# Altium PCB ifog-pcb-analogModule.PcbDoc
Units mm, origin at the board's own origin, x right, y up, seen from the top; angles counter-clockwise.
Board outline 34.3 x 47.3 mm, 4 copper layers (Top Layer, VCC, GND, Bottom Layer), stack 0.603 mm thick; 81 components, 42 nets, 256 pads, 9 vias.
Unrouted connection lines stored in the file: 10.
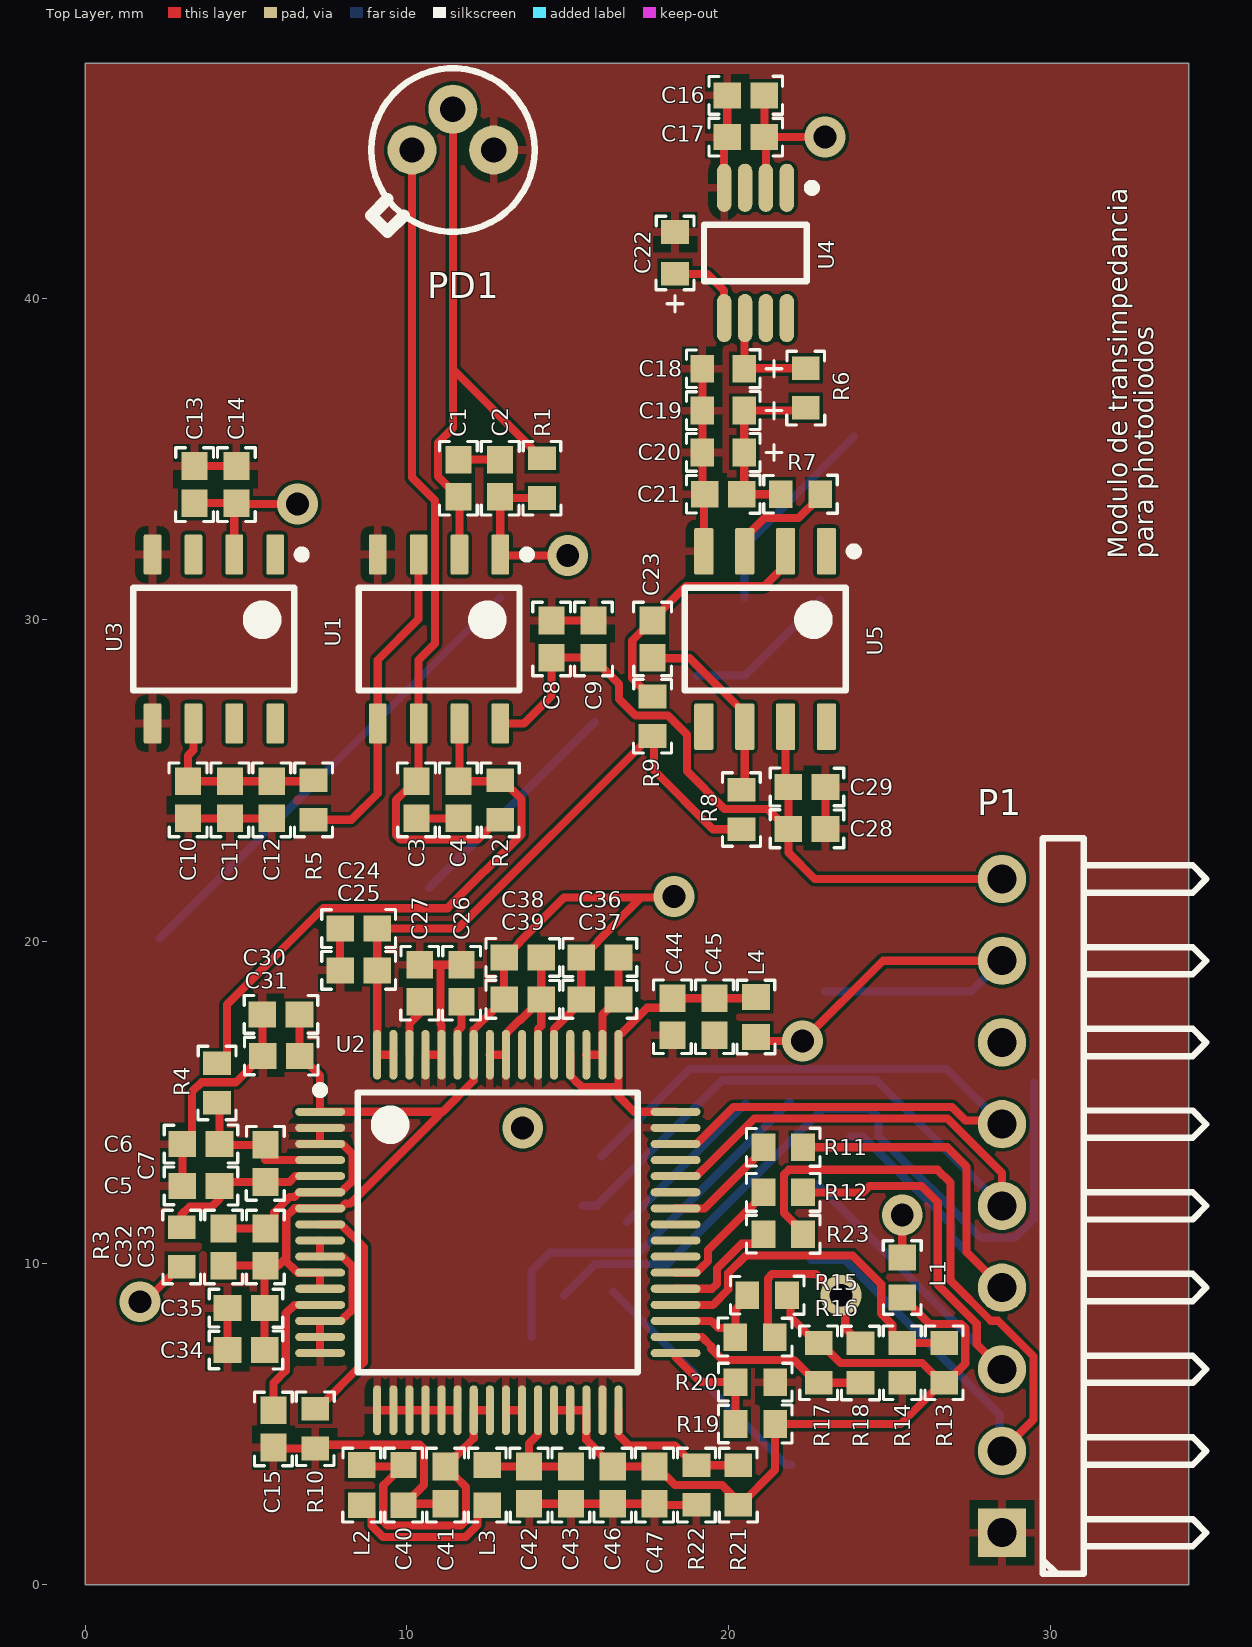
[diagram p0: Top Layer view]
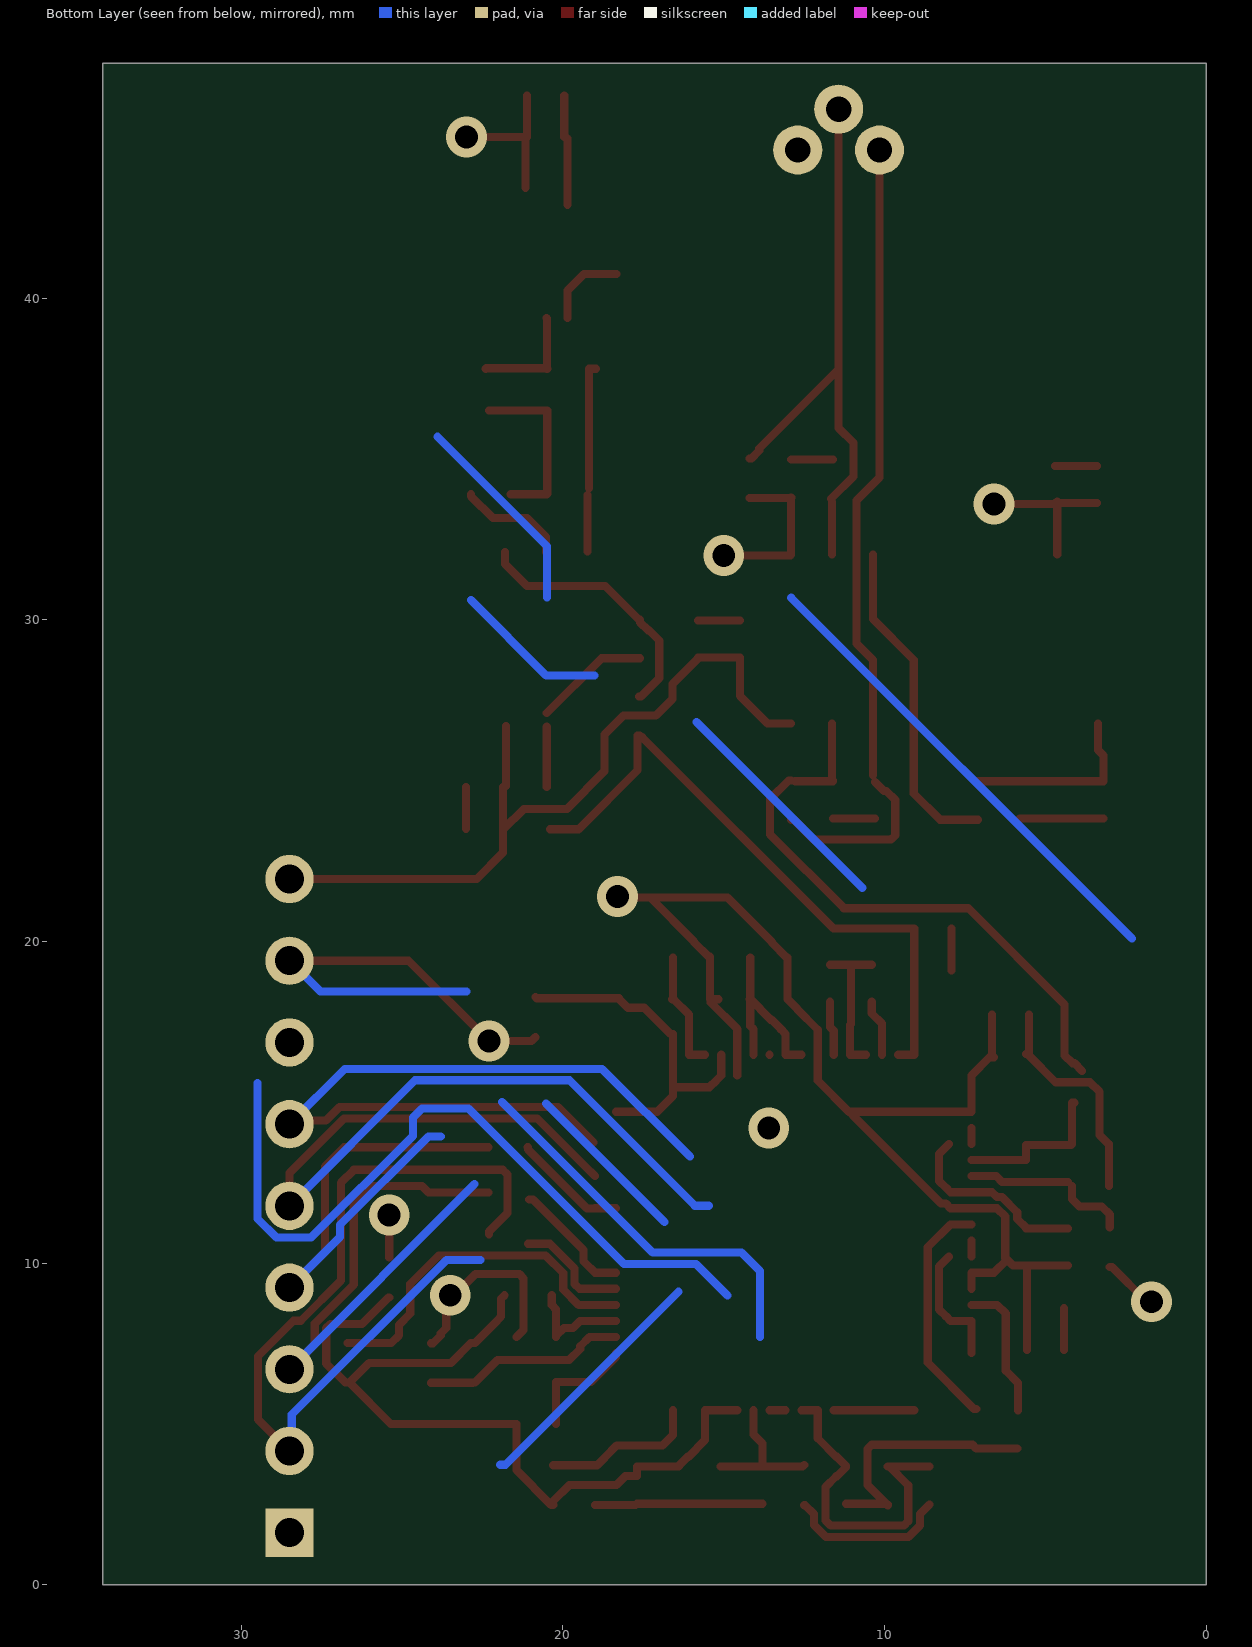
[diagram p1: Bottom Layer view, seen from below]
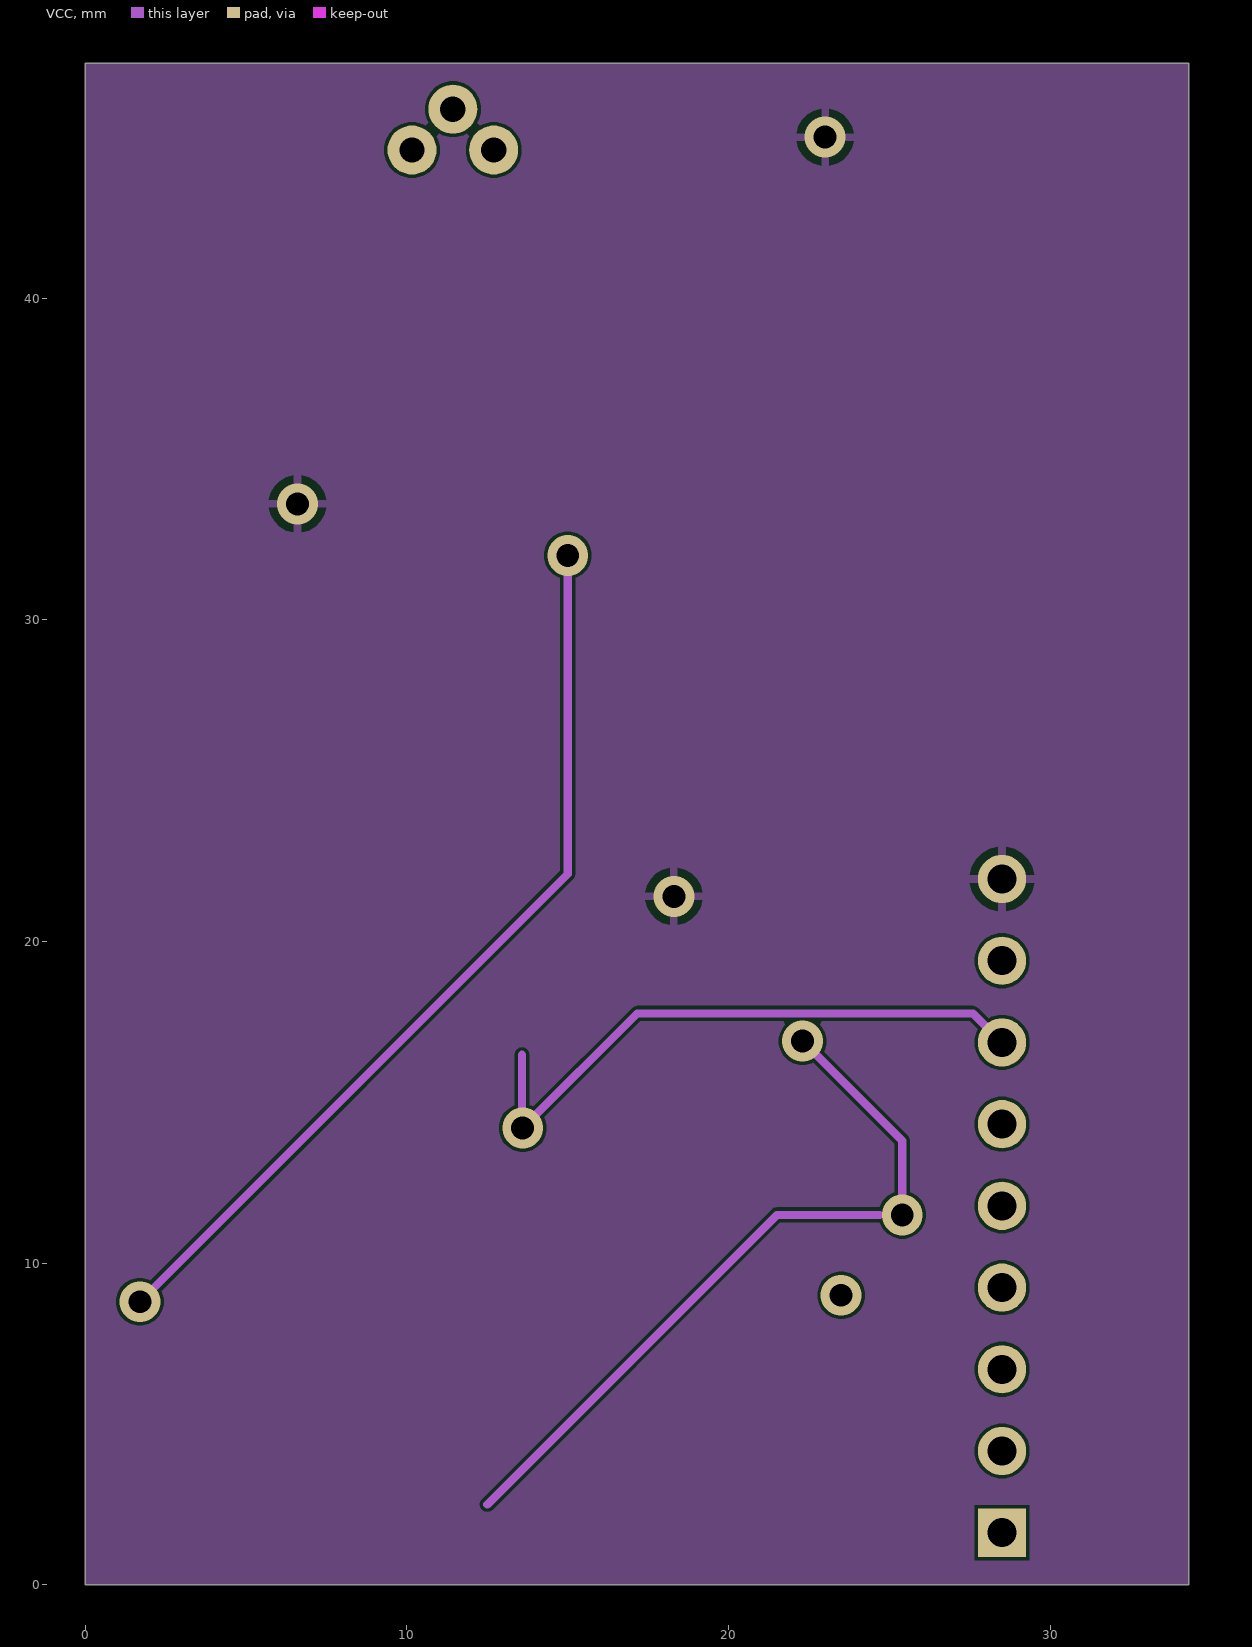
[diagram p2: VCC]
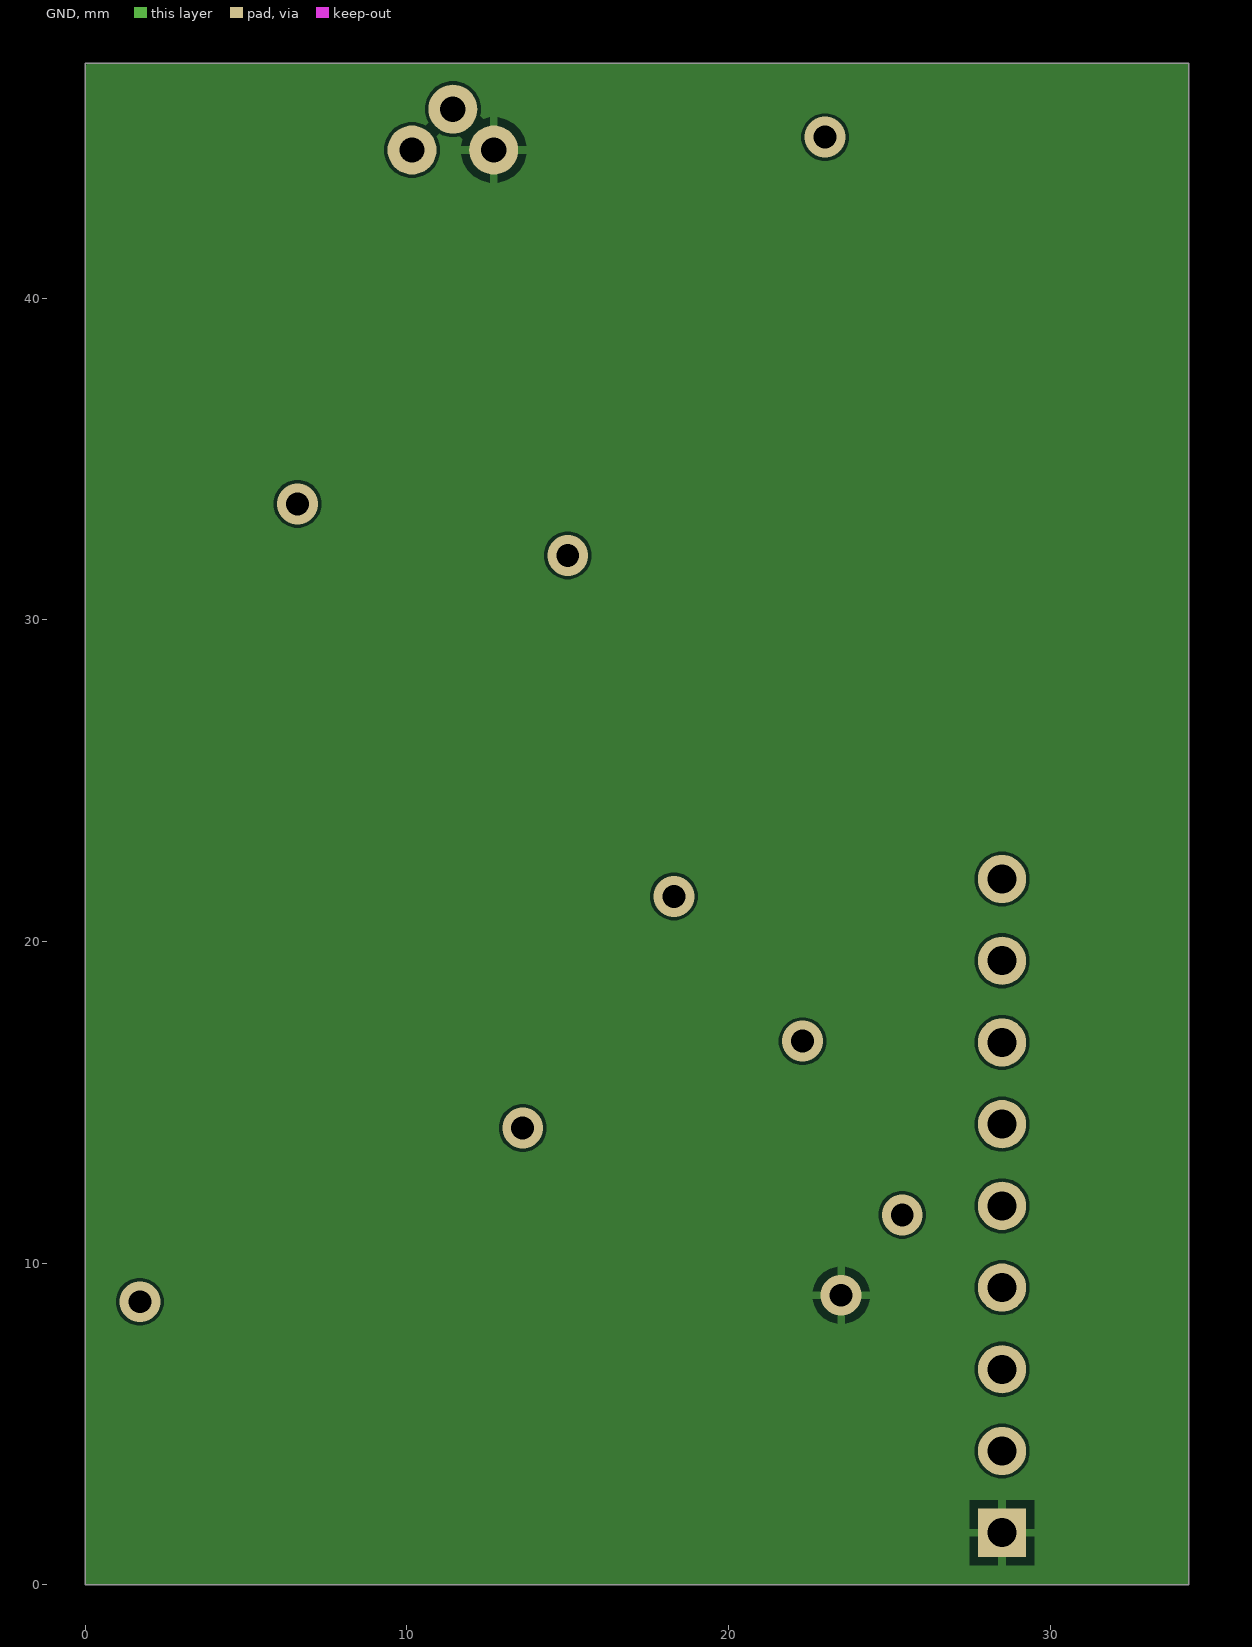
[diagram p3: GND]
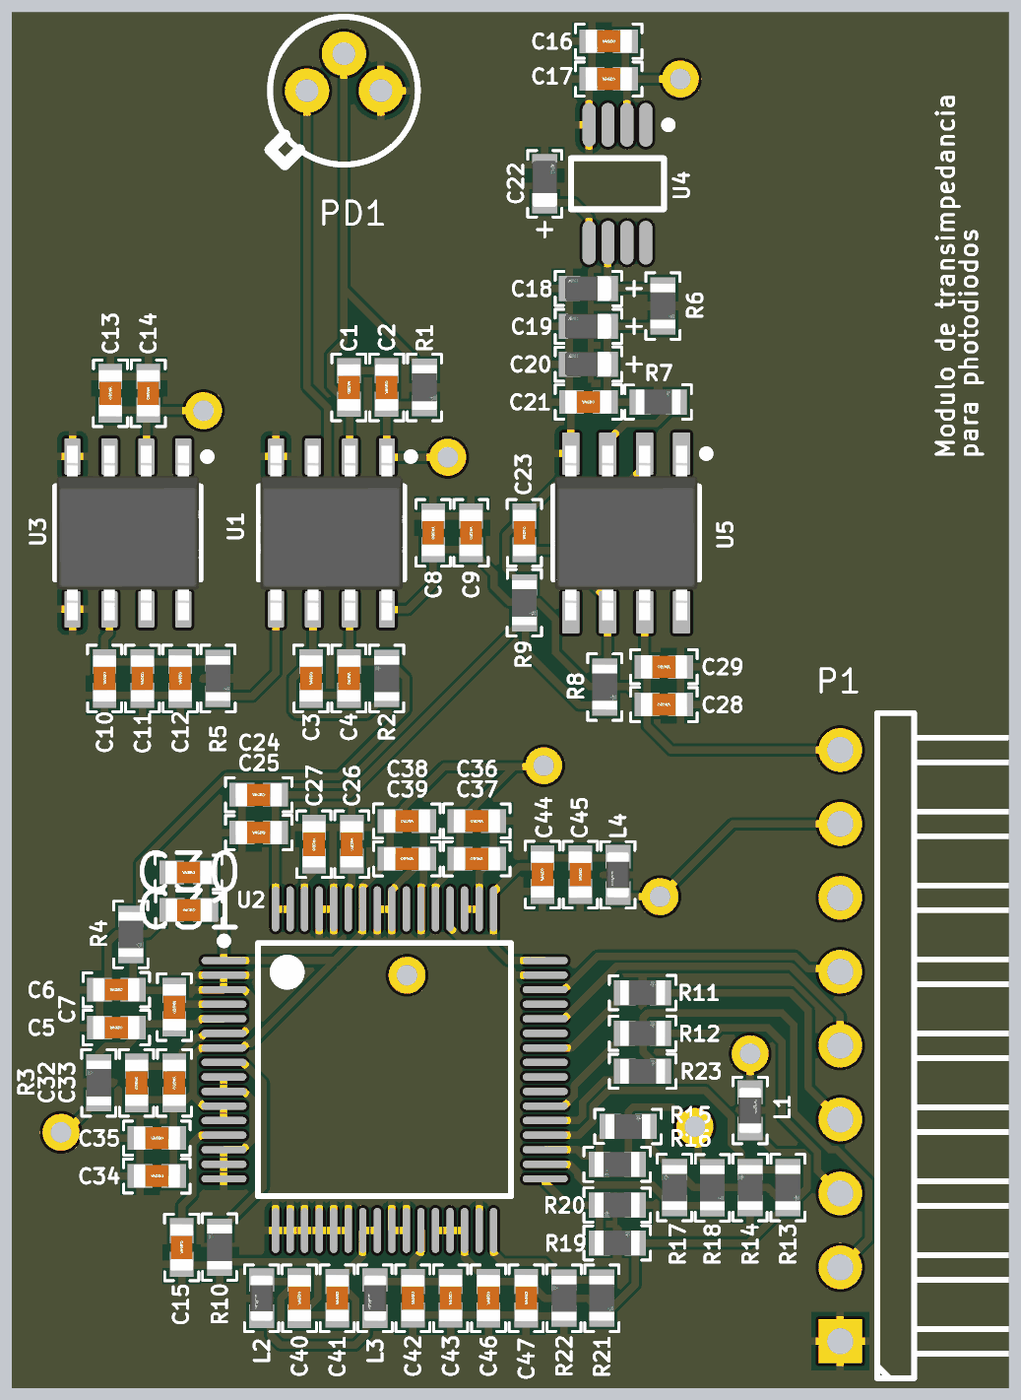
[diagram p4: 3D render of the assembled board from above, using the file's embedded part models]

## Layer stack, top to bottom
Top Solder: solder mask 0.0102, Solder Resist, Dk 3.5
Top Layer: signal copper 0.0356
Dielectric 2: prepreg 0.0711, PP-006, Dk 4.1
VCC: signal copper 0.035
Dielectric 1: core 0.32, FR-4, Dk 4.8
GND: signal copper 0.035
Dielectric 3: prepreg 0.0711, PP-006, Dk 4.1
Bottom Layer: signal copper 0.0356
Bottom Solder: solder mask 0.0102, Solder Resist, Dk 3.5

## Board outline
0,0 34.3,0 34.3,47.3 0,47.3

## Design rules (kind name [scope] priority, off if disabled: settings)
Clearance [All] p1: gap=0.1 ignorepadtopadclearanceinfootprint=TRUE except(0: Arc-Hole Track-Hole SMDPad-Hole THPad-Hole Via-Hole Fill-Hole Poly-Hole Region-Hole Text-Hole)
PolygonConnect [All] p1: connectstyle=Relief reliefconductorwidth=0.254 reliefentries=4 polygonreliefangle="90 Angle" airgapwidth=0.254
RoomDefinition ifog-pcb-analogModule [InComponentClass('ifog-pcb-analogModule')] p1: confinementstyle=ConfineIn formatcopy=TRUE lockcomponents=FALSE outline 0,0 35.7,0 35.7,65 0,65
RoutingVias [All] p1: holewidth=0.711 width=1.27 viastyle="Through Hole" minholewidth=0.711 minwidth=1.27 maxholewidth=0.711 maxwidth=1.27
SolderMaskExpansion [All] p1: expansion=0.102 istentingtop=FALSE
Width [All] p1: maxlimit=0.254 minlimit=0.254 preferedwidth=0.254
30 further rules are at their usual default settings.

## Classes and differential pairs
component class ifog-pcb-analogModule: C1 C2 C3 C4 C5 C6 C7 C8 C9 C10 C11 C12 C13 C14 C15 C16 C17 C18 C19 C20 C21 C22 C23 C24 C25 C26 C27 C28 C29 C30 C31 C32 C33 C34 C35 C36 C37 C38 C39 C40 C41 C42 C43 C44 C45 C46 C47 L1 L2 L3 L4 P1 PD1 R1 R2 R3 R4 R5 R6 R7 R8 R9 R10 R11 R12 R13 R14 R19 R20 R21 R22 R23 U1 U4 U5

## Components (designator, comment, footprint, x,y, rotation, side; value= is the part's Value field where it differs from the comment)
C1 "0.5p" CAPACITOR_0603#1 11.6,34.4 r270 top
C2 "0.5p" CAPACITOR_0603#1 12.9,34.4 r90 top
C3 "0.5p" CAPACITOR_0603#1 10.3,24.4 r90 top
C4 "0.5p" CAPACITOR_0603#1 11.6,24.4 r270 top
C5 "100p" CAPACITOR_0603#1 3.6,12.4 r0 top
C6 "100p" CAPACITOR_0603#1 3.6,13.7 r0 top
C7 "750p" CAPACITOR_0603#1 5.6,13.1 r270 top
C8 "10u" CAPACITOR_0603#1 14.5,29.4 r270 top
C9 "100n" CAPACITOR_0603#1 15.8,29.4 r270 top
C10 "10u" CAPACITOR_0603#1 3.2,24.4 r90 top
C11 "10u" CAPACITOR_0603#1 4.5,24.4 r90 top
C12 "100n" CAPACITOR_0603#1 5.8,24.4 r90 top
C13 "10u" CAPACITOR_0603#1 3.4,34.2 r270 top
C14 "100n" CAPACITOR_0603#1 4.7,34.2 r270 top
C15 "1u" CAPACITOR_0603#1 5.85,4.844 r90 top
C16 "10u" CAPACITOR_0603#1 20.537,46.3 r0 top
C17 "100n" CAPACITOR_0603#1 20.537,45 r0 top
C18 "22u" CAPACITOR_TANT_0603 19.837,37.8 r0 top value=22uF
C19 "47u" CAPACITOR_TANT_0603 19.837,36.5 r0 top value=22uF
C20 "47u" CAPACITOR_TANT_0603 19.837,35.2 r0 top value=22uF
C21 "100n" CAPACITOR_0603#1 19.837,33.9 r0 top
C22 "22u" CAPACITOR_TANT_0603 18.337,41.4 r270 top value=22uF
C23 "10n" CAPACITOR_0603#1 17.637,29.4 r90 top
C24 "100n" CAPACITOR_0603#1 8.5,20.4 r0 top
C25 "10u" CAPACITOR_0603#1 8.5,19.1 r0 top
C26 "1u" CAPACITOR_0603#1 11.7,18.7 r270 top
C27 "1u" CAPACITOR_0603#1 10.4,18.7 r270 top
C28 "10u" CAPACITOR_0603#1 22.437,23.5 r180 top
C29 "100n" CAPACITOR_0603#1 22.437,24.8 r180 top
C30 "10u" CAPACITOR_0603#1 6.086,17.732 r0 top
C31 "100n" CAPACITOR_0603#1 6.098,16.438 r0 top
C32 "10u" CAPACITOR_0603#1 4.3,10.5 r270 top
C33 "100n" CAPACITOR_0603#1 5.6,10.5 r270 top
C34 "10u" CAPACITOR_0603#1 5,7.3 r0 top
C35 "100n" CAPACITOR_0603#1 5,8.6 r0 top
C36 "10u" CAPACITOR_0603#1 16,19.5 r180 top
C37 "100n" CAPACITOR_0603#1 16,18.2 r180 top
C38 "10u" CAPACITOR_0603#1 13.6,19.5 r180 top
C39 "100n" CAPACITOR_0603#1 13.6,18.2 r180 top
C40 "10u" CAPACITOR_0603#2 9.9,3.1 r90 top
C41 "100n" CAPACITOR_0603#1 11.2,3.1 r90 top
C42 "10u" CAPACITOR_0603#1 13.8,3.1 r90 top
C43 "100n" CAPACITOR_0603#1 15.1,3.1 r90 top
C44 "10u" CAPACITOR_0603#1 18.255,17.661 r90 top
C45 "100n" CAPACITOR_0603#1 19.559,17.657 r90 top
C46 "10u" CAPACITOR_0603#1 16.4,3.1 r90 top
C47 "100n" CAPACITOR_0603#1 17.7,3.1 r90 top
L1 "1u" INDUCTOR_0603 25.4,9.553 r90 top
L2 "1u" INDUCTOR_0603 8.6,3.1 r270 top
L3 "1u" INDUCTOR_0603 12.5,3.1 r270 top
L4 "1u" INDUCTOR_0603 20.852,17.648 r270 top
P1 "Header 9H" HDR1X9H 28.5,1.62 r90 top
PD1 "PDS123-CSA-C0102" Photodetector 10.16,44.6 r270 top
R1 "100k 1%" RESISTOR_0603 14.2,34.4 r270 top
R2 "100k 1%" RESISTOR_0603 12.9,24.4 r90 top
R3 "10R" RESISTOR_0603 3,10.5 r90 top
R4 "10R" RESISTOR_0603 4.1,15.6 r270 top
R5 "0R" RESISTOR_0603 7.1,24.4 r270 top
R6 "1k" RESISTOR_0603 22.4,37.2 r270 top
R7 "100R" RESISTOR_0603 22.237,33.9 r0 top
R8 "10R" RESISTOR_0603 20.4,24.1 r270 top
R9 "1k" RESISTOR_0603 17.637,27 r270 top
R10 "7.5k" RESISTOR_0603 7.153,4.855 r90 top
R11 "50R" RESISTOR_0603 21.7,13.6 r0 top
R12 "50R" RESISTOR_0603 21.7,12.2 r0 top
R13 "10k" RESISTOR_0603 26.7,6.9 r270 top
R14 "0R" RESISTOR_0603 25.4,6.9 r90 top
R15 "10k" RESISTOR_0603 21.2,9 r0 top
R16 "0R" RESISTOR_0603 20.825,7.7 r180 top
R17 "10k" RESISTOR_0603 22.8,6.9 r90 top
R18 "0R" RESISTOR_0603 24.1,6.894 r270 top
R19 "10k" RESISTOR_0603 20.831,5 r0 top
R20 "0R" RESISTOR_0603 20.831,6.3 r180 top
R21 "10k" RESISTOR_0603 20.3,3.1 r270 top
R22 "0R" RESISTOR_0603 19,3.1 r90 top
R23 "50R" RESISTOR_0603 21.7,10.9 r0 top
U1 "OPA2356AID" OPA2356_SOIC8 11,29.4 r270 top
U2 "ADS1675IPAG" TI-PAG64_L 12.828,10.953 r0 top
U3 "REF5025AID" OPA2356_SOIC8 4,29.4 r270 top
U4 "ADR423ARMZ" ADR423_SOP8 20.837,41.4 r270 top
U5 "OPA211AIDR" OPA211_SOIC8 21.137,29.4 r270 top

## Footprints (in the part's own frame and the unit in brackets; to place one, negate y for a bottom-side part, rotate by r counter-clockwise, add the part's x,y. Pads: shape width x height; smd on the part's side, far side on the other; paste and mask are expansions set on the pad)
ADR423_SOP8 [mm] "SOP, 8-Leads, Body 3x3mm, Pitch 0.65mm, IPC High Density"
  oval 1.5x0.45 smd: 1(-2.025,0.975) 2(-2.025,0.325) 3(-2.025,-0.325) 4(-2.025,-0.975) 5(2.025,-0.975) 6(2.025,-0.325) 7(2.025,0.325) 8(2.025,0.975)
  silkscreen extent -2.15,-1.6 0.88,1.88, body extent -1.6,-1.6 1.6,1.6, height 1.1
CAPACITOR_0603#1 [mm]
  rect 0.858x0.812 smd paste+0 mask+0: 1(-0.577,0) 2(0.577,0)
  silkscreen extent -1.14,-0.59 1.14,0.59, body extent -1.11,-0.55 1.11,0.55, height 0.25
CAPACITOR_0603#2 [mm]
  rect 0.807x0.812 smd paste+0 mask+0: 1(-0.626,0) 2(0.626,0)
  silkscreen extent -1.14,-0.59 1.14,0.59, body extent -1.11,-0.55 1.11,0.55, height 0.25
CAPACITOR_TANT_0603 [mm]
  rect 0.735x0.862 smd paste+0 mask+0: 1(-0.65,0) 2(0.65,0)
  silkscreen extent -1.14,-0.59 1.83,0.59, body extent -1.1,-0.63 1.1,0.63, height 0.25
HDR1X9H [mm] "Connector; Header; 9 Position; Right Angle"
  rect 1.5x1.5 hole 0.9: 1(0,0)
  round 1.5 hole 0.9: 2(2.54,0) 3(5.08,0) 4(7.62,0) 5(10.16,0) 6(12.7,0) 7(15.24,0) 8(17.78,0) 9(20.32,0)
  silkscreen extent -1.27,-6.35 21.59,-1.27
INDUCTOR_0603 [mm]
  rect 0.807x0.858 smd paste+0 mask+0: 1(-0.626,0) 2(0.626,0)
  silkscreen extent -1.14,-0.59 1.14,0.59, body extent -1.13,-0.58 1.13,0.58, height 0.25
OPA211_SOIC8 [mm] "SOIC, 8-Leads, Body 5x4mm, Pitch 1.27mm, IPC Medium Density"
  rrect17% 1.45x0.6 smd: 1(-2.725,1.905) 2(-2.725,0.635) 3(-2.725,-0.635) 4(-2.725,-1.905) 5(2.725,-1.905) 6(2.725,-0.635) 7(2.725,0.635) 8(2.725,1.905)
  silkscreen extent -2.85,-2.5 1.6,2.88, body extent -3,-2.45 3,2.45, height 1.63
OPA2356_SOIC8 [mm] "SOIC, 8-Leads, Body 5x4mm, Pitch 1.27mm, IPC High Density"
  rrect18% 1.25x0.55 smd: 1(-2.625,1.905) 2(-2.625,0.635) 3(-2.625,-0.635) 4(-2.625,-1.905) 5(2.625,-1.905) 6(2.625,-0.635) 7(2.625,0.635) 8(2.625,1.905)
  silkscreen extent -2.75,-2.5 1.6,2.86, body extent -3,-2.45 3,2.45, height 1.63
Photodetector [mil]
  round 60 hole 31: GND(0,100) N(-50,50) P(0,0)
  silkscreen extent -100,-50 100,150
RESISTOR_0603 [mm]
  rect 0.735x0.862 smd paste+0 mask+0: 1(-0.615,0) 2(0.615,0)
  silkscreen extent -1.14,-0.59 1.14,0.59, body extent -1.08,-0.58 1.08,0.58, height 0.25
TI-PAG64_L [mm] "QFP, 64-Leads, Body 10x10mm, Pitch 0.5mm, IPC High Density"
  oval 1.55x0.25 smd: 1(-5.525,3.75) 2(-5.525,3.25) 3(-5.525,2.75) 4(-5.525,2.25) 5(-5.525,1.75) 6(-5.525,1.25) 7(-5.525,0.75) 8(-5.525,0.25) 9(-5.525,-0.25) 10(-5.525,-0.75) 11(-5.525,-1.25) 12(-5.525,-1.75) 13(-5.525,-2.25) 14(-5.525,-2.75) 15(-5.525,-3.25) 16(-5.525,-3.75) 33(5.525,-3.75) 34(5.525,-3.25) 35(5.525,-2.75) 36(5.525,-2.25) 37(5.525,-1.75) 38(5.525,-1.25) 39(5.525,-0.75) 40(5.525,-0.25) 41(5.525,0.25) 42(5.525,0.75) 43(5.525,1.25) 44(5.525,1.75) 45(5.525,2.25) 46(5.525,2.75) 47(5.525,3.25) 48(5.525,3.75)
  oval 0.25x1.55 smd: 17(-3.75,-5.525) 18(-3.25,-5.525) 19(-2.75,-5.525) 20(-2.25,-5.525) 21(-1.75,-5.525) 22(-1.25,-5.525) 23(-0.75,-5.525) 24(-0.25,-5.525) 25(0.25,-5.525) 26(0.75,-5.525) 27(1.25,-5.525) 28(1.75,-5.525) 29(2.25,-5.525) 30(2.75,-5.525) 31(3.25,-5.525) 32(3.75,-5.525) 49(3.75,5.525) 50(3.25,5.525) 51(2.75,5.525) 52(2.25,5.525) 53(1.75,5.525) 54(1.25,5.525) 55(0.75,5.525) 56(0.25,5.525) 57(-0.25,5.525) 58(-0.75,5.525) 59(-1.25,5.525) 60(-1.75,5.525) 61(-2.25,5.525) 62(-2.75,5.525) 63(-3.25,5.525) 64(-3.75,5.525)
  silkscreen extent -5.65,-4.35 4.35,4.55, body extent -5,-5 5,5, height 1.2

## Part data
C1 C2 C3 C4 C5 C6 C7 C8 C9 C10 C11 C12 C13 C14 C15 C16 C17 C21 C23 C24 C25 C26 C27 C28 C29 C30 C31 C32 C33 C34 C35 C36 C37 C38 C39 C40 C41 C42 C43 C44 C45 C46 C47: library part CAPACITOR_0603, Manufacturer=KEMET, Manufacturer Part Number=C0603C105K3RACTU, Part Number=C0603C105K3RACTU
C18 C19 C20 C22: library part CAPACITOR_TANT_0603, "CAP TANT 0603", Capacitance=22uF, Leakage Current=11uA, Manufacturer="Kyocera AVX", Manufacturer Part Number=F981A226MMALZT, Package=F98M, Ripple Current=56mA, Temperature="-55°C to +125°C", Temperature Coefficient=30%, Temperature Range High=+125°C, Temperature Range Low=-55°C, Tolerance=20%, Voltage Rating=10V, Automotive=No, Category=Cap, ComponentLink2Description=Datasheet, ComponentLink2URL=http://datasheets.avx.com/F98.pdf, Device Class L1="Passive Components", Device Class L2=Capacitors, Device Class L3="Tantalum Capacitors", Digikey Description="CAP TANT 22UF 20% 10V 0603", Dissipation Factor=30%, Esr=8Ω, Footprint Url=http://www.avx.com/download/software/literature/AVX-Footprint-Library.pdf, Height=0.9mm, Lead Free=Yes, Life=1000Hours, Material=Tantalum, Mouser Description="Tantalum Capacitors - Solid SMD 22uF 10V 20% 0603,1.6x0.85x0.65mm", Octopart=https://octopart.com/f981a226mmalzt-avx-33960279, RoHS=TRUE
L1 L2 L3 L4: library part INDUCTOR_0603, "FIXED IND SMD", Case Code (Imperial)=0603, Case Code (Metric)=1608, Current Rating=150mA, DC Resistance (DCR)=200mR, Inductance=1uH, Inductance Tolerance=20%, Manufacturer=Murata, Manufacturer Part Number=LQM18FN1R0M00D, Max Operating Temperature=125°C, Min Operating Temperature=-55°C, Package Quantity=1, Self Resonant Frequency=120MHz, Test Frequency=1MHz, Case/Package=0603, Core Material=Ferrite, DC Current=150mA, Depth=0.9mm, Height=0.9mm, Height - Seated (Max)=0.035inch, Lead Free="Lead Free", Length=0.063inch, Max DC Current=150mA, Military Standard=Not, Mount="Surface Mount", Packaging="Tape and Reel", Radiation Hardening=No, Rated Current-Max=150mA, REACH SVHC="No SVHC", RoHS Compliant=Yes, Saturation Current=150mA, Series=LQM18F, Shielding=Shielded, Termination=SMD/SMT, Tolerance=20%, Width=0.031inch
P1: "Header, 9-Pin, Right Angle", LatestRevisionDate=17-Jul-2002, LatestRevisionNote="Re-released for DXP Platform.", Publisher="Altium Limited"
PD1: "Photodiode 3 pins", Text Field1=10, Text Field2=20
R1 R2 R3 R4 R5 R6 R7 R8 R9 R10 R11 R12 R13 R14 R15 R16 R17 R18 R19 R20 R21 R22 R23: library part RESISTOR_0603, "Chip Resistor 0603 (1608 Metric), RoHS, Tape and Reel", Manufacturer=Vishay, Manufacturer Part Number=CRCW060310K0FKEA, Max Operating Temperature="155 degC", Min Operating Temperature="-55 degC", Package Quantity=5000, Voltage Rating="75 V", ComponentLink1Description="Manufacturer URL", ComponentLink1URL=http://www.vishay.com/, ComponentLink2Description=Datasheet, ComponentLink2URL=https://datasheet.ciiva.com/11809/0900766b80d98afc-11809037.pdf, DatasheetVersion=06/2012, Height="0.45 mm", Length="1.55 mm", Mounting Technology="Surface Mount", PackageDescription="2-Pin Surface Mount Device, Body 1.575 x 0.85 mm", PackageReference=0603, Packaging="Tape and Reel", REACH SVHC=Unknown, RoHSCompliant=true
U1: "200 MHz GBW, CMOS Dual Operational Amplifier, 2.5 to 5.5 V, -40 to 125 degC, 8-pin SOIC (D8), Green (RoHS & no Sb/Br)", Manufacturer="Texas Instruments", 2nd Harmonic(dBc)=81, 3rd Harmonic(dBc)=93, @ MHz=1, Acl, min stable gain(V/V)=1, BW @ Acl(MHz)=450, Code_JEDEC=MS-012, ComponentLink1Description="Manufacturer URL", ComponentLink1URL=http://www.ti.com/, ComponentLink2Description=Datasheet, ComponentLink2URL=http://www.ti.com/general/docs/lit/getliterature.tsp?genericPartNumber=OPA2356&fileType=pdf, ComponentLink3Description="Package Specification", ComponentLink3URL=http://www.ti.com/litv/pdf/msoi002j, DatasheetVersion=SBOS212A, Diff Gain(%)=0.02, Diff Phase(deg)=0.05, Eco-Plan="Green (RoHS & no Sb/Br)", Iib(Max)(nA)=0.05, Io(Typ)(mA)=100, Iq per channel(Max)(mA)=14, Manufacturer Part Number=OPA2356AID, Mounting Technology="Surface Mount", Number of Channels=2, PackageDescription="8-Pin Plastic Small Outline, Body 4.9 x 3.9 mm, Pitch 1.27 mm", PackageReference=D0008A, PackageVersion="4040047-3/M, 06/2011", PartNumber=OPA2356AID, Rail-Rail=Out, Settling Time (0.1%)(Typ)(ns)=30, Slew Rate(Typ)(V/us)=360, Sub Family="High Output Current Amplifier (>=50mA), High Speed Amplifier (>=50MHz), Low Supply Voltage Amplifier (<=2.7V)", THD (Fc is 1 MHz)(Typ)(dB)=-79, Vio(Max)(mV)=9, Vn at Flatband(Typ)(nV/rtHz)=5.8, Vs(Max)(V)=5.5, Vs(Min)(V)=2.5
U2: library part ADS1675, "4 MSPS, 24-Bit ADC, -40 to 85 degC, 64-pin QFP (PAG64), Green (RoHS & no Sb/Br)", Analog Voltage AV/DD(Max)(V)=5.25, Analog Voltage AV/DD(Min)(V)=4.75, Manufacturer="Texas Instruments", # Input Channels=1, Architecture=Delta-Sigma, Code_JEDEC=MS-026, ComponentLink1Description="Manufacturer URL", ComponentLink1URL=http://www.ti.com/, ComponentLink2Description=Datasheet, ComponentLink2URL=http://www.ti.com/general/docs/lit/getliterature.tsp?genericPartNumber=ADS1675&fileType=pdf, ComponentLink3Description="Package Specification", ComponentLink3URL=http://www.ti.com/lit/ml/mtqf006a/mtqf006a.pdf, DatasheetVersion=SBAS416D, Digital Supply(Max)(V)=3.15, Digital Supply(Min)(V)=2.85, Eco-Plan="Green (RoHS & no Sb/Br)", Interface="Parallel LVDS, Serial SPI", Manufacturer Part Number=ADS1675IPAG, Mounting Technology="Surface Mount", PackageDescription="64-Pin Plastic Flat Pack, Body 10 x 10 mm, Pitch 0.50 mm", PackageReference=PAG64, PackageVersion="4040282/C, 11/1996", PartNumber=ADS1675IPAG, Resolution(Bits)=24, Sample Rate (max)(SPS)=4M, SFDR(dB)=120, SNR(dB)=92, SubFamily="Precision ADC (<=10MSPS)"
U3: "Low Noise, Very Low Drift, Precision Voltage Reference, -40 to 125 degC, 8-pin SOIC (D), Green (RoHS & no Sb/Br)", Manufacturer="Texas Instruments", Rating=Military, Temp Coeff(Max)(ppm/ degree C)=3, Code_JEDEC=MS-012, ComponentLink1Description="Manufacturer URL", ComponentLink1URL=http://www.ti.com/, ComponentLink2Description=Datasheet, ComponentLink2URL=http://www.ti.com/general/docs/lit/getliterature.tsp?genericPartNumber=REF5025&fileType=pdf, ComponentLink3Description="Package Specification", ComponentLink3URL=http://www.ti.com/litv/pdf/msoi002j, ComponentLink4Description="URL Link1", ComponentLink4URL="Samples URL:http://www.ti.com/product/ref5025", DatasheetVersion=SBOS410E, Eco-Plan="Green (RoHS & no Sb/Br)", Initial Accuracy @ 25/deg C(%)=0.05, Iout/Iz(Max)(mA)=10, Iq(Max)(uA)=1000, Manufacturer Part Number=REF5025AID, Mounting Technology="Surface Mount", PackageDescription="8-Pin Plastic Small Outline, Body 4.9 x 3.9 mm, Pitch 1.27 mm", PackageReference=D0008A, PackageVersion=4040047-3/M, PartNumber=REF5025AID, SubFamily="Series Voltage Reference", VI(Max)(V)=18, VI(Min)(V)=2.7, VO(V)=2.5
U4: "Ultraprecision, Low Noise, XFET(R) Voltage Reference, 3 V Output, 5 to 18 V Supply, Industrial, 8-pin SOP (RM-8), Tube", Manufacturer="Analog Devices", Operating Temp Range="-40 to 125 degC", Code_JEDEC=MO-187-AA, ComponentLink1Description="Manufacturer URL", ComponentLink1URL=http://www.analog.com/en/index.html, ComponentLink2Description=Datasheet, ComponentLink2URL=http://www.analog.com/static/imported-files/data_sheets/ADR420_421_423_425.pdf, ComponentLink3Description="Package Specification", ComponentLink3URL=http://www.analog.com/static/imported-files/packages/PKG_PDF/MSOP%28RM%29/RM_8.pdf, ComponentLink4Description="URL Link1", ComponentLink4URL="Product URL:http://www.analog.com/en/special-linear-functions/voltage-references/adr423/products/product.html", DatasheetVersion="Rev. I", Manufacturer Part Number=ADR423ARMZ, Max V Supply (V)=18, Min V Supply (V)=5, Mounting Technology="Surface Mount", PackageDescription="8-Pin Mini Small Outline Package, Body 3 x 3 mm, Pitch 0.65 mm", PackageReference=RM-8, PackageVersion=Aug-05, Packing=Tube, PartNumber=ADR423ARMZ, Ref Out TC (ppm/C)=2, Vout=3V
U5: "1.1 nV/rtHz Noise, Low Power, Precision Operational Amplifier, 4.5 to 36 V, -40 to 125 degC, 8-pin SOIC (D8), Green (RoHS & no Sb/Br)", Manufacturer="Texas Instruments", Rating=Catalog, Total Supply Voltage(Max)(+5V is 5, +/-5V is 10)=36, Total Supply Voltage(Min)(+5V is 5, +/-5V is 10)=4.5, CMRR(Min)(dB)=114, Code_JEDEC=MS-012, ComponentLink1Description="Manufacturer URL", ComponentLink1URL=http://www.ti.com/, ComponentLink2Description=Datasheet, ComponentLink2URL=http://www.ti.com/lit/ds/symlink/opa211.pdf, ComponentLink3Description="Package Specification", ComponentLink3URL=http://www.ti.com/litv/pdf/msoi002j, DatasheetVersion=SBOS377G, Eco-Plan="Green (RoHS & no Sb/Br)", GBW(Typ)(MHz)=45, IIB(Max)(pA)=175000, Iq per channel(Max)(mA)=4.5, Manufacturer Part Number=OPA211AIDR, Mounting Technology="Surface Mount", Number of Channels=1, Offset Drift(Typ)(uV/C)=0.15, PackageDescription="8-Pin Plastic Small Outline, Body 4.9 x 3.9 mm, Pitch 1.27 mm", PackageReference=D0008A, PackageVersion="4040047-3/M, 06/2011", Packing="LARGE T&R", PartNumber=OPA211AIDR, Slew Rate(Typ)(V/us)=27, Sub Family="High Supply Voltage Amplifier (>=30V), Low Noise Amp (<=10nV/rtHz), Low Offset Voltage Amplifier (<=500uV), Precision Amplifier", Vio (25C)(Max)(mV)=0.125

## Via types
v1: diameter 1.27, hole 0.711, Top Layer to Bottom Layer, 9 vias

## Nets (pads, with @x,y where several pads share a name; then routed paths per layer and width w, separated by ;. In a path a pad name is that pad's centre, name@x,y a point inside that pad or via, vN(x,y) a via of type N, cw(c..) or ccw(c..) an arc to the next point about the centre after c; other vN are vias at no path point)
+3VD: L1.2 L2.2 L3.2 L4.2 P1.8 | length 43.7
  Top Layer w0.254: L2.2@8.6,2.5 8.902,2.198 8.902,1.841 9.253,1.489 11.823,1.489 12.198,1.864 12.198,2.198 12.474,2.474 L3.2 ; L4.2 20.975,16.9 v1(22.3,16.9) 24.8,19.4 P1.8 ; L1.2 v1(25.4,11.5)
  VCC w0.254: 12.5,2.5 21.5,11.5 24.7,11.5 ; v1(22.3,16.9) 25.4,13.8 v1(25.4,11.5)
  Bottom Layer w0.254: 22.997,18.44 27.54,18.44 P1.8
+5VA: C8.2 C9.2 C13.2 C14.2 C16.2 C17.2 C28.2 C29.2 C30.2 C31.2 C32.2 C33.2 C34.2 C35.2 C36.2 C37.2 C38.2 C39.2 P1.9 U1.8 U2.1 U2.7 U2.11 U2.12 U2.53 U2.58 U3.2 U4.2 U5.7 | length 73.8
  Top Layer w0.254: C13.2 C14.2@4.635,33.623 ; C32.2 C33.2 6.011,9.923 6.248,10.16 6.248,11.449 6.502,11.703 U2.7 7.949,11.703 8.097,11.851 8.251,11.851 11,14.6 ; U3.2 C14.2@4.635,33.623 ; C14.2@4.635,33.665 C14.2@4.635,33.623 ; C34.2 C35.2 C33.2@5.577,9.9 ; 6.194,10.106 6.597,9.703 U2.11 U2.12 ; C31.2@6.6,16.4 6.737,16.4 7.303,15.833 U2.1 11.103,14.703 12.078,15.678 U2.58 12.078,17.255 12.721,17.898 12.721,17.921 13,18.2 C39.2 C38.2 13.046,19.5 13.505,19.959 13.505,19.984 14.887,21.366 17.537,21.366 ; v1(6.6,33.6) 4.723,33.6 C14.2 C14.2@4.635,33.623 ; C31.2@6.663,16.451 C30.2 ; U1.8 12.905,26.772 13.636,26.772 14.5,27.635 C8.2 C9.2 15.8,28.8 16.595,28.005 16.595,27.537 17.111,27.021 18.12,27.021 18.705,26.436 18.705,25.291 19.875,24.121 21.216,24.121 21.858,23.479 C28.2@21.858,23.476 ; U2.53@14.578,15.832 U2.53 14.578,17.272 C37.2@15.403,18.097 ; C37.2@15.164,18.2 C37.2 C36.2 C36.2@15.446,19.5 ; C36.2@15.424,19.525 15.471,19.525 15.921,19.975 15.921,20 17.284,21.363 18.263,21.363 v1(18.3,21.4) ; C16.2 C17.2 C17.2@21.149,45 ; C17.2@21.149,45.048 C17.2@21.149,45 ; U4.2 C17.2@21.162,44.862 ; C29.2@21.772,24.828 U5.7 U5.7@21.772,26.7 ; C29.2 C28.2 21.86,22.758 22.678,21.94 28.487,21.94 P1.9@28.522,21.905 ; v1(23,45) C17.2@21.149,45
AD_AINN_0: C6.2 C7.1 R4.2 U2.4 | length 4.9
  Top Layer w0.254: R4.2 4.177,14.985 C6.2 ; C6.2@4.2,13.677 C7.1 5.6,13.203 U2.4
AD_AINP_0: C5.2 C7.2 R3.2 U2.5 | length 5.3
  Top Layer w0.254: R3.2 3,11.509 3.251,11.76 3.948,11.76 4.177,11.989 C5.2 ; C5.2@4.3,12.523 6.35,12.523 6.53,12.703 U2.5
AD_CAP1_0: C26.2 U2.59 | length 1.7
  Top Layer w0.254: U2.59 11.578,17.221 11.7,17.343 C26.2
AD_CAP2_0: C27.2 U2.62 | length 1.8
  Top Layer w0.254: U2.62 10.078,17.444 10.4,17.766 C27.2
AD_CLK_0: P1.7 U2.55 | length 19
  Top Layer w0.254: U2.55 U2.55@13.58,16.476
  VCC w0.254: v1@13.58,14.22 13.58,16.476 ; v1(13.6,14.2) 17.162,17.762 27.598,17.762 P1.7
AD_CS: P1.3 R12.2 | length 18.6
  Top Layer w0.254: R12.2 24.178,12.2 24.378,12.4 26,12.4 26.5,11.9 26.5,9.336 27.712,8.124 27.712,7.488 P1.3
  Bottom Layer w0.254: 22.744,12.457 P1.3
AD_CS_0: R12.1 U2.38 | length 3.8
  Top Layer w0.254: U2.38 18.999,9.703 19.147,9.851 19.149,9.851 19.355,10.058 19.355,10.407 20.931,11.983 R12.1@21.048,11.983
AD_DOUT: P1.5 U2.44 | length 28.2
  Top Layer w0.254: U2.44@19.001,12.705 19.147,12.851 19.149,12.851 19.355,13.058 20.798,14.5 26.8,14.5 28.5,12.8 P1.5
  Bottom Layer w0.254: 15.469,11.786 15.9,11.786 19.799,15.684 24.596,15.684 P1.5
AD_DRATE0_0: R13.1 R14.2 U2.36 | length 18.9
  Top Layer w0.254: U2.36 19.509,8.703 19.99,9.184 19.99,9.691 20.541,10.242 23.858,10.242 24.744,9.356 24.744,8.43 25.096,8.078 25.096,7.756 25.336,7.515 R13.1
  Bottom Layer w0.254: 16.408,9.11 21.784,3.734 21.946,3.734
AD_DRATE1_0: R15.1 R16.2 U2.35 | length 26.9
  Top Layer w0.254: U2.35 19.464,8.203 19.682,7.985 19.969,7.985 20.21,7.744 R16.2 20.213,7.703 20.213,8.564 20.344,8.696 R15.1@20.344,9
  Bottom Layer w0.254: 14.884,8.992 15.865,9.972 18.1,9.972 22.936,14.808 24.384,14.808 24.663,14.529 24.663,13.956 27.825,10.795 28.905,10.795 29.489,11.379 29.489,15.596
AD_DRATE2_0: R17.1 R18.2 U2.34 | length 18.6
  Top Layer w0.254: U2.34 19.174,7.703 19.461,7.416 19.461,7.329 19.805,6.985 22.036,6.985 22.736,6.285 R17.1 22.803,6.282 24.097,6.282 R18.2
  Bottom Layer w0.254: 13.872,7.703 13.872,9.754 14.444,10.326 17.209,10.326 21.895,15.011
AD_DRDY: P1.6 U2.46 | length 24.4
  Top Layer w0.254: U2.46@19.049,13.751 20.152,14.854 26.947,14.854 27.369,14.432 28.388,14.432 P1.6
  Bottom Layer w0.254: 16.053,13.31 18.781,16.038 26.782,16.038 P1.6
AD_FPATH_0: R19.1 R20.2 U2.33 | length 3.6
  Top Layer w0.254: U2.33 18.353,7.078 19.132,6.3 R20.2 R19.1
AD_LL_CONFIG_0: R21.1 R22.2 U2.32 | length 4.9
  Top Layer w0.254: U2.32 16.578,4.655 16.9,4.333 18.328,4.333 18.696,3.965 18.696,3.956 18.936,3.715 R21.1
AD_RBIAS_0: R10.2 U2.8 | length 7.3
  Top Layer w0.254: R10.2 7.217,5.471 8.659,6.913 8.659,10.495 7.953,11.201 7.305,11.201 U2.8
AD_SCLK: P1.4 R11.2 | length 16.4
  Top Layer w0.254: R11.2 26.8,13.6 27.4,13 27.4,10.34 P1.4
  Bottom Layer w0.254: 23.799,13.941 24.178,13.941 26.925,11.194 26.925,10.815 P1.4
AD_SCLK_0: R11.1 U2.42 | length 8.8
  Top Layer w0.254: U2.42 U2.42@18.999,11.703 ; U2.42@19,11.7 19.248,11.7 21.085,13.536 R11.1 R11.1@21.1,13.6
  Bottom Layer w0.254: 16.84,11.278 20.523,14.961
AD_START: P1.2 R23.2 | length 26.5
  Top Layer w0.254: R23.2@22.3,10.9 22.3,10.979 21.721,11.558 21.721,12.751 21.87,12.9 26.5,12.9 26.9,12.5 26.9,9.458 28.15,8.209 28.373,8.209 29.477,7.105 29.477,5.137 P1.2
  Bottom Layer w0.254: 22.56,10.1 23.619,10.1 28.428,5.291 28.428,4.232 P1.2
AD_START_0: R23.1 U2.37 | length 3.6
  Top Layer w0.254: U2.37 19.487,9.203 19.636,9.352 19.636,9.838 20.398,10.6 R23.1@21.085,10.6
AD_VCM_0: C15.2 U2.13 | length 4.4
  Top Layer w0.254: C15.2 5.85,6.272 6.233,6.655 6.233,8.434 6.502,8.703 U2.13
AD_VREFP: R7.2 U5.3 | length 9.8
  Top Layer w0.254: U5.3@20.523,32.097 20.523,32.571 21.111,33.159 22.175,33.159 22.852,33.836 R7.2
  Bottom Layer w0.254: 20.498,30.688 20.498,32.283 23.901,35.687
AD_VREP_0: C24.2 C25.2 R8.2 R9.2 U2.63 U2.64 | length 27.4
  Top Layer w0.254: U2.63 U2.64 9.078,17.78 9.077,17.781 C25.2 C24.2 11.588,20.4 17.534,26.345 R9.2@17.63,26.345 ; R9.2@17.61,26.404 17.68,26.404 17.68,25.32 19.515,23.485 R8.2
  Bottom Layer w0.254: 10.693,21.666 15.85,26.822
GND: C5.1 C6.1 C8.1 C9.1 C10.1 C11.1 C12.1 C13.1 C14.1 C15.1 C16.1 C17.1 C18.1 C19.1 C20.1 C21.1 C22.1 C24.1 C25.1 C26.1 C27.1 C28.1 C29.1 C30.1 C31.1 C32.1 C33.1 C34.1 C35.1 C36.1 C37.1 C38.1 C39.1 C40.1 C41.1 C42.1 C43.1 C44.1 C45.1 C46.1 C47.1 P1.1 PD1.GND R10.1 R14.1 R16.1 R18.1 R20.1 R22.1 U1.4 U2.2 U2.3 U2.6 U2.9 U2.10 U2.14 U2.15 U2.16 U2.17 U2.18 U2.19 U2.20 U2.21 U2.22 U2.25 U2.26 U2.31 U2.47 U2.50 U2.51 U2.54 U2.56 U2.57 U2.60 U2.61 U3.4 U3.5 U4.4 U5.4 | length 72.9
  Top Layer w0.254: C5.1 C6.1 3.046,13.7 3.325,13.979 3.325,15.329 3.617,15.621 4.681,15.621 C31.1@5.509,16.449 ; C10.1 C11.1 C12.1 ; C13.1 C14.1 ; C32.1 C33.1@5.577,11.077 ; C34.1 C35.1 ; C30.1 C31.1@5.509,16.449 ; C33.1@5.562,11.073 5.573,11.073 C33.1@5.577,11.077 ; C33.1 C33.1@5.577,11.077 ; C31.1@5.6,16.5 5.56,16.5 C31.1@5.509,16.449 ; C15.1@5.877,4.24 R10.1 7.27,4.357 10.4,4.357 10.533,4.224 10.533,3.105 C40.1@9.952,2.523 ; U2.16 U2.15 U2.14 7.949,8.203 8.097,8.351 8.099,8.351 8.305,8.558 8.305,9.895 U2.10@8,10.2 ; U2.10 U2.9 ; U2.3 U2.2 ; C25.1 C24.1 ; U2.3@8,13.7 8.305,13.395 8.305,12.558 8.099,12.351 8.097,12.351 7.949,12.203 U2.6 6.657,12.203 6.511,12.057 6.356,12.057 5.879,11.581 5.879,11.379 C33.1@5.577,11.077 ; U2.17 U2.18 U2.19 U2.20 U2.21 U2.22 ; C40.1@9.897,2.474 C40.1 ; C40.1@9.9,2.5 9.929,2.5 C40.1@9.952,2.523 ; C27.1 11.049,19.277 ; U2.61 U2.60 11.078,17.399 11.049,17.428 11.049,19.277 ; C41.1 C40.1@9.952,2.523 ; C26.1 11.049,19.277 ; U2.57 U2.56 13.078,17.124 13.226,17.272 13.226,17.274 13.519,17.567 13.546,17.567 13.875,17.896 13.875,17.921 14.154,18.2 C39.1 ; U2.25 U2.26 ; C42.1 C43.1 C46.1 C47.1 ; U2.54 14.078,17.272 14.177,17.371 C39.1 ; C38.1 C39.1 ; C39.1@14.2,18.2 C39.1 ; C8.1 C9.1 ; U2.51 U2.50 16.078,17.724 16.554,18.2 C37.1@16.6,18.2 ; C37.1 C36.1 ; C47.1@17.738,2.485 R22.1 ; C18.1@18.974,37.8 C18.1 C19.1 C21.1@19.187,34.087 ; U5.4 C21.1@19.232,33.876 ; U4.4@19.862,42.901 C17.1@19.862,44.962 ; C17.1 C16.1 ; R16.1 21.221,7.92 21.221,9.525 21.354,9.658 22.721,9.658 23.379,9 v1(23.5,9) 23.625,8.875 23.625,7.984 23.796,7.813 23.796,7.75 24.036,7.509 R18.1 ; C28.1 C29.1
L1+3VD: C46.2 C47.2 L1.1 R13.2 R15.2 R17.2 R19.2 R21.2 U2.28 U2.29 U2.30 | length 27
  Top Layer w0.254: U2.28 U2.29 U2.30 15.578,4.499 16.098,3.979 16.121,3.979 16.407,3.693 C46.2@16.407,3.677 ; C46.2 C46.2@16.407,3.677 ; R21.2 20.364,2.485 21.446,3.568 21.446,4.946 R19.2@21.5,5 ; R21.2@20.3,2.6 19.801,3.099 18.339,3.099 18.059,3.378 17.7,3.378 C47.2 C46.2@16.407,3.677 ; R19.2 25.352,5 26.636,6.285 26.021,6.9 23.479,6.9 22.864,7.515 22.736,7.515 22.035,8.217 22.035,8.225 21.923,8.337 21.923,8.892 R15.2 ; L1.1 25.426,8.927 26.243,8.11 27.225,8.11 27.358,7.977 27.358,6.879 26.764,6.285 R13.2
L2+3VD: C40.2 C41.2 L2.1 U2.23 U2.24 | length 10.6
  Top Layer w0.254: L2.1@8.6,3.677 9.9,3.677 9.848,3.677 9.267,3.095 9.267,1.976 9.4,1.843 11.677,1.843 11.833,2 11.833,3.046 11.504,3.375 11.479,3.375 11.2,3.654 11.2,3.7 11.479,3.979 11.502,3.979 12.078,4.555 U2.23 U2.24
L3+3VD: C42.2 C43.2 L3.1 U2.27 | length 4.5
  Top Layer w0.254: L3.1 12.549,3.677 C42.2 ; U2.27 14.078,4.672 13.8,4.394 C42.2 ; C43.2 C42.2
L4+3VD: C44.2 C45.2 L4.1 U2.48 U2.49 U2.52 | length 11
  Top Layer w0.254: U2.52 15.078,15.832 15.226,15.684 15.226,15.683 15.44,15.469 16.578,15.469 ; C44.2 C44.2@18.255,18.234 ; U2.48 17.069,14.703 16.578,15.194 16.578,15.469 ; L4.1 20.812,18.234 C45.2 C44.2@18.255,18.234 ; 16.578,15.469 U2.49 16.578,17.124 16.58,17.126 16.659,17.126 17.469,17.936 17.976,17.936 18.255,18.215 C44.2@18.255,18.234
NetC1_1: C1.1 C2.2 | length 1.3
  Top Layer w0.254: C1.1 C2.2
NetC3_1: C3.1 C4.2 | length 1.3
  Top Layer w0.254: C3.1 C4.2
PD_ANO: C3.2 PD1.P R2.1 U1.6 | length 25.4
  Top Layer w0.254: PD1.P 10.16,34.42 10.871,33.708 10.871,29.259 10.365,28.753 U1.6 C3.2@10.365,25.165 ; C3.2@10.3,24.954 10.021,24.675 9.949,24.675 9.667,24.393 9.667,23.3 9.8,23.167 12.219,23.167 12.836,23.785 R2.1
PD_CAT: C1.2 PD1.N R1.1 U1.2 | length 18.6
  Top Layer w0.254: C1.2@11.321,34.102 C1.2 ; PD1.N 11.43,37.785 ; U1.2 C1.2@11.635,33.665 ; C1.2@11.66,33.76 10.967,34.454 10.967,35.5 11.43,35.963 11.43,37.785 ; R1.1 14.136,35.015 13.896,35.256 13.896,35.319 11.43,37.785
REF2.5: R5.2 U1.3 U1.5 | length 10.3
  Top Layer w0.254: R5.2 8.282,23.785 9.095,24.598 U1.5 9.095,28.753 10.365,30.023 U1.3
U1_VOUTN: C4.1 R2.2 R4.1 U1.7 | length 33.6
  Top Layer w0.254: R4.1@3.859,15.975 R4.1 4.164,16.215 4.404,16.456 4.404,18.037 7.4,21.033 11.268,21.033 13.558,23.323 13.558,24.421 12.979,25 R2.2@12.9,25 ; C4.1 R2.2@12.777,24.977 ; C4.1@11.6,25 11.635,25.035 U1.7
  Bottom Layer w0.254: 2.311,20.091 12.903,30.683
U1_VOUTP: C2.1 R1.2 R3.1 U1.1 | length 35.6
  Top Layer w0.254: v1(1.7,8.8) 1.852,8.8 2.936,9.885 R3.1 ; C2.1@12.9,33.8 C2.1@12.905,33.795 ; R1.2 12.915,33.785 C2.1@12.905,33.795 ; v1(15,32) 12.93,32 U1.1 C2.1@12.905,33.795
  VCC w0.254: v1(1.7,8.8) 15,22.1 v1(15,32)
U3_VOUT: C10.2 C11.2 C12.2 R5.1 U3.6 | length 5.8
  Top Layer w0.254: U3.6 3.365,25.946 3.2,25.781 C10.2 C11.2 R5.1@7.123,24.977
U4_TRIM: C22.2 U4.5 | length 2.6
  Top Layer w0.254: C22.2 19.345,40.75 19.862,40.234 U4.5
U4_VOUT: C18.2 R6.1 U4.6 | length 3.5
  Top Layer w0.254: C18.2 C18.2@20.499,37.813 ; C18.2@20.499,37.801 C18.2@20.499,37.813 ; U4.6 20.499,39.362 C18.2@20.499,37.813 ; R6.1@22.4,37.8 22.385,37.815 20.502,37.815 C18.2@20.499,37.813
U4_VOUT_1: C19.2 C20.2 C21.2 R6.2 R7.1 | length 5.5
  Top Layer w0.254: R7.1 20.5,33.9 20.487,33.913 C20.2 C19.2 R6.2@22.3,36.5
U5_VININ: C23.2 R9.1 U5.2 | length 13
  Top Layer w0.254: R9.1 17.573,27.615 17.004,28.185 17.004,29.346 17.332,29.675 17.358,29.675 17.6,29.917 17.6,30 17.637,30 18.683,31.046 21.118,31.046 21.8,31.728 U5.2@21.8,32.1
  Bottom Layer w0.254: 19.022,28.27 20.519,28.27 22.86,30.611
U5_VOUT: C23.1 R8.1 U5.6 | length 5.5
  Top Layer w0.254: C23.1@17.6,28.8 18.802,28.8 U5.6@20.502,27.1 ; R8.1@20.502,24.802 U5.6
pads on no net: U2.39 U2.40 U2.41 U2.43 U2.45 U3.1 U3.3 U3.7 U3.8 U4.1 U4.3 U4.7 U4.8 U5.1 U5.5 U5.8

## Polygon pours and split planes (outlines as drawn)
GND on GND "GND_L03_P001" (solid, pour order 1): 0,47.2 0.1,47.3 34.3,47.3 34.3,0 0,0 0,47.3
+5VA on VCC "+5VA_L02_P002" (solid, pour order 2): 0,47.3 34.3,47.3 34.3,0 0,0
GND on Top Layer "GND_L01_P000" (solid, pour order 0): 0,47.3 34.3,47.3 34.3,0 0,0

## Silkscreen, mask and mechanical layers (free items; w line width, h text height)
Top Overlay:
  text "Modulo de transimpedancia" at 32.4,31.9 h0.6 r90
  text "para photodiodos" at 33.2,31.9 h0.6 r90